# Altium PCB stereoscopicPi.PcbDoc
Units mm, origin at the board's own origin, x right, y up, seen from the top; angles counter-clockwise.
Board outline 100 x 50 mm, 2 copper layers (Top Layer, Bottom Layer); 31 components, 81 nets, 346 pads, 10 vias.
Unrouted connection lines stored in the file: 74.
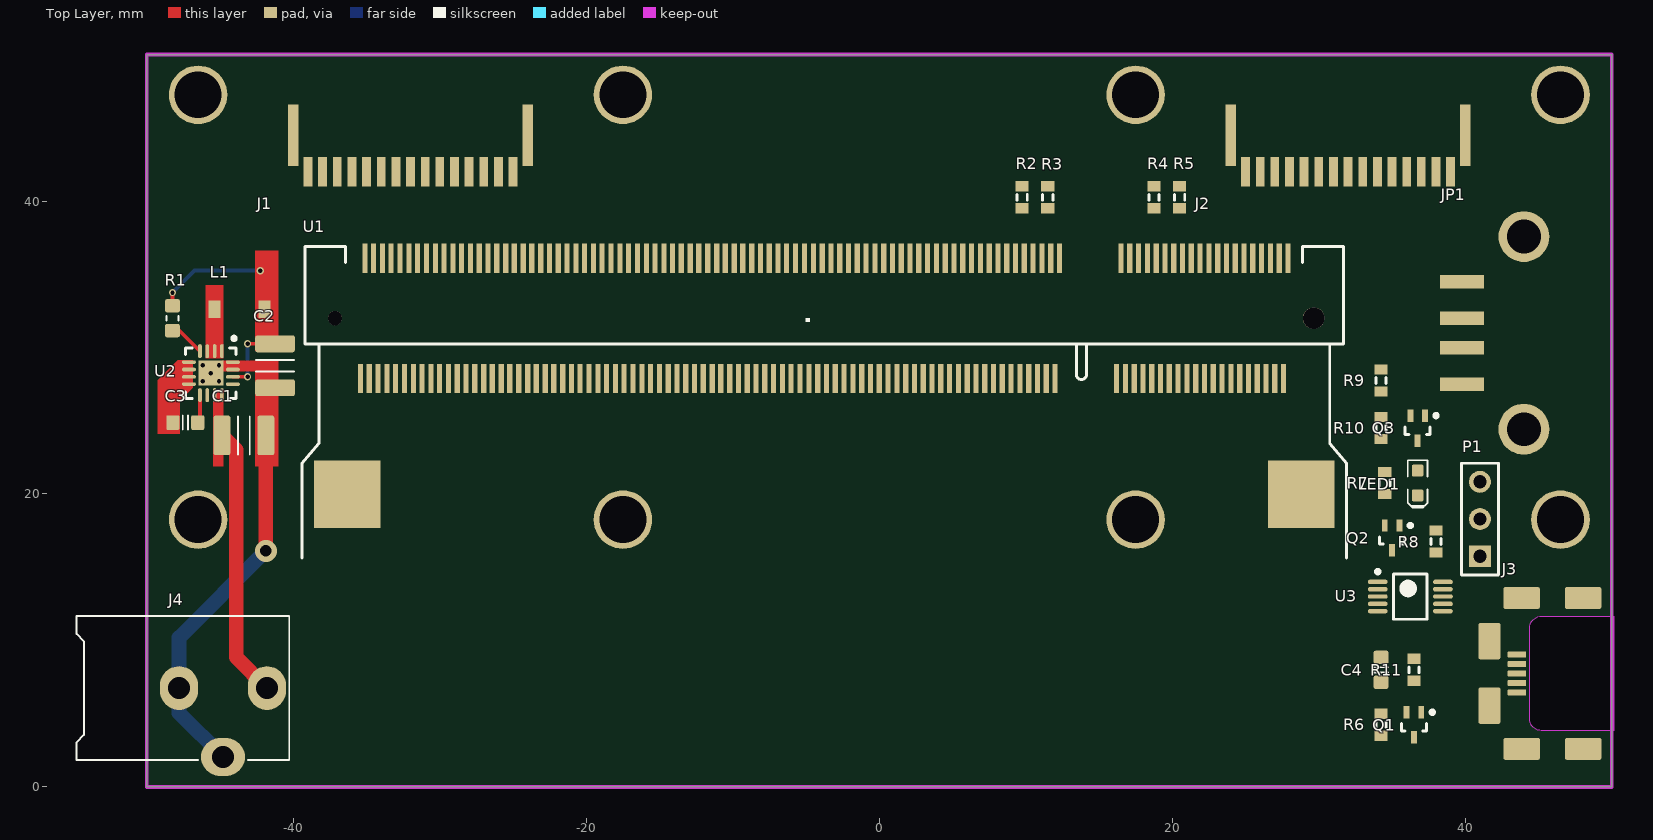
[diagram p0: Top Layer view]
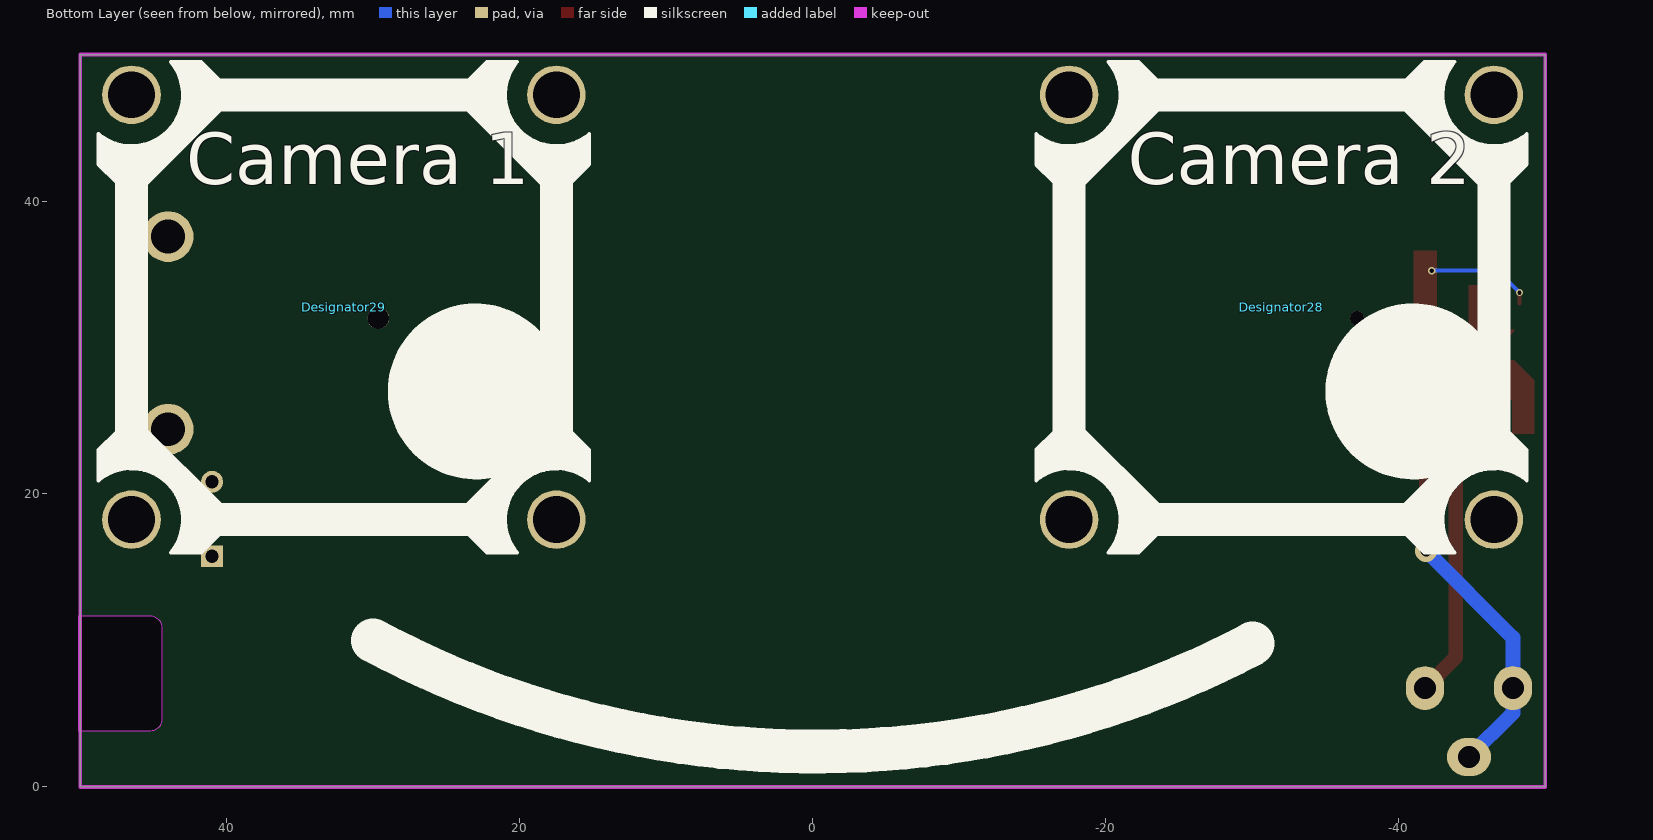
[diagram p1: Bottom Layer view, seen from below]

## Layer stack, top to bottom
Top Solder: solder mask 0.0102, Solder Resist, Dk 3.5
Top Layer: signal copper 0.0356
Dielectric1: dielectric 0.32, FR-4, Dk 4.8
Bottom Layer: signal copper 0.0356
Bottom Solder: solder mask 0.0102, Solder Resist, Dk 3.5

## Board outline
-50,0 -50,50 50,50 50,0

## Design rules (kind name [scope] priority, off if disabled: settings)
Clearance [All] p1: gap=0.1
FabricationTestPointUsage TestPointUsage [All] p1: valid=0 allowmultiple=FALSE
FabricationTestpoint Testpoint [All] p1: side=3 testpointundercomponent=TRUE minsize=1.016 maxsize=2.54 preferedsize=1.524 minholesize=0 maxholesize=1.016 preferedholesize=0.813 testpointgrid=0.025 allowsidetop=TRUE allowsidebottom=TRUE usegrid=TRUE gridtolerance=0
PolygonConnect [All] p1: connectstyle=Relief reliefconductorwidth=0.254 reliefentries=4 polygonreliefangle="90 Angle" airgapwidth=0.254
RoutingVias [All] p1: holewidth=0.711 width=1.27 viastyle="Through Hole" minholewidth=0.711 minwidth=1.27 maxholewidth=0.711 maxwidth=1.27
SilkToSolderMaskClearance SilkscreenOverComponentPads [IsPad] p1: minsilkscreentomaskgap=0.254 clearancetoexposedcopper=TRUE
SolderMaskExpansion [All] p1: expansion=0.102
Width [All] p1: maxlimit=1 minlimit=0.25 preferedwidth=0.25
27 further rules are at their usual default settings.

## Classes and differential pairs
component class StereoscopicPi: C1 C2 C3 C4 J1 J2 J3 J4 JP1 L1 LED1 P1 Q1 Q2 Q3 R1 R2 R3 R4 R5 R6 R7 R8 R9 R10 R11 U1 U2 U3

## Components (designator, comment, footprint, x,y, rotation, side; value= is the part's Value field where it differs from the comment)
C1 "10µ" CAPC3225X220N -43.375,24 r0 top
C2 "approved sub OK" CAPC3225X220N -41.25,28.75 r270 top
C3 "Kemet C0603C332J3RACTU" CAPC1608X90N -47.375,24.875 r180 top
C4 "" CAPC1608X90N 34.25,8 r270 top
Designator28 "Comment" PI-CAM-LENS-MOUNT -32,32.75 r90 bottom
Designator29 "Comment" PI-CAM-LENS-MOUNT 32,32.75 r90 bottom locked
J1 "Camera1" SFW15R-2STE1LF -32,42 r180 top
J2 "Camera2" SFW15R-2STE1LF 32,42 r180 top
J3 "uUSB B (SLAVE, USB BOOT)" USB_Micro-B_Molex_SMD 50,7.75 r180 top
J4 "CONN_PWR_JACK_2.1x5.5mm" CONN_PWR_JACK_2.1x5.5mm -55.5,6.75 r90 top
JP1 "USB A (HOST)" USB-A-S-NOSILK-FEMALE 44,31 r180 top
L1 "Inductor" IHLP-1212BZ-11 -45.375,32.625 r0 top
LED1 "Green" LED-0603-GREEN 36.75,20.75 r270 top
P1 "Header 3" HDR1X3 41,15.75 r90 top
Q1 "DMG1012T-7" DMG1012T-7 36.5,4.25 r270 top
Q2 "DMG1012T-7" DMG1012T-7 35,17 r270 top
Q3 "DMG1012T-7" DMG1012T-7 36.75,24.5 r270 top
R1 "Thick Film" RESC1608X55N -48.25,32 r270 top
R2 "Res3" J1-0603 9.75,40.25 r90 top
R3 "Res3" J1-0603 11.5,40.25 r90 top
R4 "Res3" J1-0603 18.75,40.25 r90 top
R5 "Res3" J1-0603 20.5,40.25 r90 top
R6 "Res3" J1-0603 34.25,4.25 r90 top
R7 "Green" J1-0603 34.5,20.75 r90 top
R8 "Res3" J1-0603 38,16.75 r270 top
R9 "Res3" J1-0603 34.25,27.75 r90 top
R10 "Res3" J1-0603 34.25,24.5 r270 top
R11 "Res3" J1-0603 36.5,8 r90 top
U1 "Raspberry Pi Compute Module As anounced in this blog post  http://www.raspberrypi.org/raspberry-pi-compute-module-new-product/  Based on infomation from this schematic http://www.raspberrypi.org/wp-content/uploads/2014/04/RPI-CM-V1_1-SCHEMATIC.pdf  Footprint is unproven and no matching part confimed as of yet" 1-1376408-4 -4.75,32 r180 top
U2 "TPS62143RGTT" QFN50P300X300X100_HS-17M -45.625,28.25 r270 top
U3 "FSUSB42MUX" FSUSB42MUX 36.25,13 r0 top

## Footprints (in the part's own frame and the unit in brackets; to place one, negate y for a bottom-side part, rotate by r counter-clockwise, add the part's x,y. Pads: shape width x height; smd on the part's side, far side on the other; paste and mask are expansions set on the pad)
1-1376408-4 [mil]
  round 58 hole 58: 1(-1354.33,0)
  rect 14x79 smd: 1(-1285.43,-161.42) 2(-1273.62,162) 3(-1261.81,-161.42) 4(-1250,162) 5(-1238.19,-161.42) 6(-1226.38,162) 7(-1214.57,-161.42) 8(-1202.76,162) 9(-1190.94,-161.42) 10(-1179.13,162) 11(-1167.32,-161.42) 12(-1155.51,162) 13(-1143.7,-161.42) 14(-1131.89,162) 15(-1120.08,-161.42) 16(-1108.27,162) 17(-1096.46,-161.42) 18(-1084.65,162) 19(-1072.83,-161.42) 20(-1061.02,162) 21(-1049.21,-161.42) 22(-1037.4,162) 23(-1025.59,-161.42) 24(-1013.78,162) 25(-1001.97,-161.42) 26(-990.16,162) 27(-978.35,-161.42) 28(-966.54,162) 29(-954.72,-161.42) 30(-942.91,162) 31(-931.1,-161.42) 32(-919.29,162) 33(-907.48,-161.42) 34(-895.67,162) 35(-883.86,-161.42) 36(-872.05,162) 37(-860.24,-161.42) 38(-848.43,162) 39(-836.61,-161.42) 40(-824.8,162) 41(-671.26,-161.42) 42(-659.45,162) 43(-647.64,-161.42) 44(-635.83,162) 45(-624.02,-161.42) 46(-612.2,162) 47(-600.39,-161.42) 48(-588.58,162) 49(-576.77,-161.42) 50(-564.96,162) 51(-553.15,-161.42) 52(-541.34,162) 53(-529.53,-161.42) 54(-517.72,162) 55(-505.91,-161.42) 56(-494.09,162) 57(-482.28,-161.42) 58(-470.47,162) 59(-458.66,-161.42) 60(-446.85,162) 61(-435.04,-161.42) 62(-423.23,162) 63(-411.42,-161.42) 64(-399.61,162) 65(-387.8,-161.42) 66(-375.98,162) 67(-364.17,-161.42) 68(-352.36,162) 69(-340.55,-161.42) 70(-328.74,162) 71(-316.93,-161.42) 72(-305.12,162) 73(-293.31,-161.42) 74(-281.5,162) 75(-269.68,-161.42) 76(-257.87,162) 77(-246.06,-161.42) 78(-234.25,162) 79(-222.44,-161.42) 80(-210.63,162) 81(-198.82,-161.42) 82(-187.01,162) 83(-175.2,-161.42) 84(-163.39,162) 85(-151.57,-161.42) 86(-139.76,162) 87(-127.95,-161.42) 88(-116.14,162) 89(-104.33,-161.42) 90(-92.52,162) 91(-80.71,-161.42) 92(-68.9,162) 93(-57.09,-161.42) 94(-45.28,162) 95(-33.46,-161.42) 96(-21.65,162) 97(-9.84,-161.42) 98(2,162) 99(14,-161.42) 100(26,162) 101(38,-161.42) 102(50,162) 103(62,-161.42) 104(73,162) 105(85,-161.42) 106(97,162) 107(109,-161.42) 108(121,162) 109(132,-161.42) 110(144,162) 111(156,-161.42) 112(168,162) 113(180,-161.42) 114(191,162) 115(203,-161.42) 116(215,162) 117(227,-161.42) 118(239,162) 119(250,-161.42) 120(262,162) 121(274,-161.42) 122(286,162) 123(298,-161.42) 124(310,162) 125(321,-161.42) 126(333,162) 127(345,-161.42) 128(357,162) 129(369,-161.42) 130(380,162) 131(392,-161.42) 132(404,162) 133(416,-161.42) 134(428,162) 135(439,-161.42) 136(451,162) 137(463,-161.42) 138(475,162) 139(487,-161.42) 140(499,162) 141(510,-161.42) 142(522,162) 143(534,-161.42) 144(546,162) 145(558,-161.42) 146(569,162) 147(581,-161.42) 148(593,162) 149(605,-161.42) 150(617,162) 151(628,-161.42) 152(640,162) 153(652,-161.42) 154(664,162) 155(676,-161.42) 156(688,162) 157(699,-161.42) 158(711,162) 159(723,-161.42) 160(735,162) 161(747,-161.42) 162(758,162) 163(770,-161.42) 164(782,162) 165(794,-161.42) 166(806,162) 167(817,-161.42) 168(829,162) 169(841,-161.42) 170(853,162) 171(865,-161.42) 172(876,162) 173(888,-161.42) 174(900,162) 175(912,-161.42) 176(924,162) 177(936,-161.42) 178(947,162) 179(959,-161.42) 180(971,162) 181(983,-161.42) 182(995,162) 183(1006,-161.42) 184(1018,162) 185(1030,-161.42) 186(1042,162) 187(1054,-161.42) 188(1065,162) 189(1077,-161.42) 190(1089,162) 191(1101,-161.42) 192(1113,162) 193(1125,-161.42) 194(1136,162) 195(1148,-161.42) 196(1160,162) 197(1172,-161.42) 198(1184,162) 199(1195,-161.42) 200(1207,162)
  round 38 hole 38: 1(1276,0)
  rect 178x182 smd: M1(-1320.87,473) M2(1243,473)
  silkscreen extent -1443,-193 1365,644
CAPC1608X90N [mm] "Chip Capacitor, Body 1.6x0.8mm, EIA 0603, IPC Medium Density"
  round 0.254 on Mech15: 0(0,0)
  rrect25% 0.9x1 smd: 1(-0.85,0) 2(0.85,0)
  Top Layer pour cut-out: -0.6,0.5 -0.4,0.7 0.4,0.7 0.6,0.5 0.6,-0.5 0.4,-0.7 -0.4,-0.7 -0.6,-0.5
  silkscreen extent -0.18,-0.48 0.18,0.48, body extent -0.85,-0.45 0.85,0.45, height 0.89
CAPC3225X220N [mm] "Chip Capacitor, Body 3.2x2.5mm, EIA 1210, IPC Medium Density"
  round 0.508 on Mech15: 0(0,0)
  rrect25% 1.15x2.7 smd: 1(-1.5,0) 2(1.5,0)
  silkscreen extent -0.4,-1.3 0.4,1.3, body extent -1.8,-1.4 1.8,1.4, height 2.19
CONN_PWR_JACK_2.1x5.5mm [mm] "Power Connector, 2.1mm ID, 5.5mm OD"
  oval 3x2.6 hole 1.511: 1(0,-13.7) 2(0,-7.7)
  oval 2.6x3 hole 1.511: 3(-4.7,-10.7)
  silkscreen extent -4.9,-15.22 4.92,-0.7, body extent -4.9,-14.1 4.5,0, height 11
DMG1012T-7 [mm] "SOT23, 3-Leads, Body 1.60x1.60mm, Pitch 0.50mm, IPC Medium Density"
  rect 0.85x0.4 smd: D(0.85,0) G(-0.85,0.5) S(-0.85,-0.5)
  silkscreen extent -0.97,-0.85 0.43,1.38, body extent -0.43,-0.85 0.43,0.85, height 0.9
FSUSB42MUX [mm] "TSSOP, 10-Leads, Body 3.00x3.00mm, Pitch 0.50mm, IPC Medium Density"
  oval 1.35x0.3 smd: 1(-2.225,1) 2(-2.225,0.5) 3(-2.225,0) 4(-2.225,-0.5) 5(-2.225,-1) 6(2.225,-1) 7(2.225,-0.5) 8(2.225,0) 9(2.225,0.5) 10(2.225,1)
  silkscreen extent -2.35,-1.55 1.15,1.82, body extent -1.55,-1.55 1.55,1.55, height 1.1
HDR1X3 [mm] "Connector; Header; 3 Position"
  rect 1.5x1.5 hole 0.9: 1(0,0)
  round 1.5 hole 0.9: 2(2.54,0) 3(5.08,0)
  silkscreen extent -1.27,-1.27 6.35,1.27
IHLP-1212BZ-11 [mm]
  rect 0.8x1.2 smd: 0(0,0) 1(3.4,0)
  body extent -0.1,-1.5 3.55,1.5, height 2
J1-0603 [mm] "Chip Resistor, Body 1.6x0.8mm, IPC High Density"
  rect 0.7x0.9 smd: 1(-0.75,0) 2(0.75,0)
  silkscreen extent -0.2,-0.35 0.2,0.35, body extent -0.85,-0.48 0.85,0.48, height 0.9
LED-0603-GREEN [mm]
  round 0.254 on Mech15: 0(0,0)
  rrect25% 0.8x0.8 smd: A(-0.85,0) K(0.85,0)
  Top Layer pour cut-out: -0.5,0.5 0.5,0.5 0.5,-0.5 -0.5,-0.5
  silkscreen extent -1.55,-0.67 1.68,0.67, body extent -0.8,-0.4 0.8,0.4, height 0.75
PI-CAM-LENS-MOUNT [mm]
  round 4 hole 3.2: M3(-14.5,-14.5) M3(-14.5,14.5) M3(14.5,-14.5) M3(14.5,14.5)
  silkscreen extent -16.75,-16.75 16.75,16.75
QFN50P300X300X100_HS-17M [mm] "QFN, 16-Leads, Body 3.00x3.00mm, Pitch 0.50mm, Thermal Pad 1.70x1.70mm, IPC Low Density"
  oval 0.95x0.25 smd: 1(-1.5,0.75) 1(-1.5,-0.25) 1(-1.5,0.25) 4(-1.5,-0.75) 9(1.5,-0.75) 10(1.5,-0.25) 11(1.5,0.75) 11(1.5,0.25)
  oval 0.25x0.95 smd: 5(-0.75,-1.5) 6(-0.25,-1.5) 7(0.25,-1.5) 8(0.75,-1.5) 13(0.75,1.5) 14(0.25,1.5) 15(-0.75,1.5) 15(-0.25,1.5)
  rect 1.7x1.7 smd: 15(0,0)
  silkscreen extent -2.5,-1.73 1.73,1.73, body extent -1.58,-1.58 1.58,1.58, height 1
RESC1608X55N [mm] "Chip Resistor, Body 1.6x0.8mm, EIA 0603, IPC Medium Density"
  round 0.254 on Mech15: 0(0,0)
  rrect25% 0.9x1 smd: 1(-0.85,0) 2(0.85,0)
  Top Layer pour cut-out: -0.6,0.5 -0.4,0.7 0.4,0.7 0.6,0.5 0.6,-0.5 0.4,-0.7 -0.4,-0.7 -0.6,-0.5
  silkscreen extent -0.15,-0.41 0.15,0.41, body extent -0.87,-0.47 0.88,0.48, height 0.54
SFW15R-2STE1LF [mm]
  rect 0.6x2 smd: 1(-7,0) 2(-6,0) 3(-5,0) 4(-4,0) 5(-3,0) 6(-2,0) 7(-1,0) 8(0,0) 9(1,0) 10(2,0) 11(3,0) 12(4,0) 13(5,0) 14(6,0) 15(7,0)
  rect 0.7x4.2 smd: ""(-8,-2.5) ""(8,-2.5)
  body extent -10.5,-6.5 10.5,0, height 2.7
USB-A-S-NOSILK-FEMALE [mil]
  rect 119x36 smd: D+(166,-39.37) D-(166,40) GND(166,-137.8) VBUS(166,138)
  round 136.5 hole 91: S1(0,-258.5) S2(0,259)
USB_Micro-B_Molex_SMD [mm]
  round 0.508 on Mech15: 0(0,0)
  rrect20% 1.25x0.4 smd: 1(6.475,1.3) 2(6.475,0.65) 3(6.475,0) 4(6.475,-0.65) 5(6.475,-1.3)
  rrect20% 2.5x1.5 smd: SH(1.95,5.15) SH(1.95,-5.15) SH(6.15,5.15) SH(6.15,-5.15)
  rrect20% 1.5x2.5 smd: SH(8.35,-2.2) SH(8.35,2.2)
  Keep-Out Layer board cut-out: -0.127,3.9 4.8,3.9 5.106,3.839 5.366,3.666 5.539,3.406 5.6,3.1 5.6,3.1 5.6,-3.1 5.539,-3.406 5.366,-3.666 5.106,-3.839 4.8,-3.9 4.8,-3.9 -0.127,-3.9
  body extent -21.01,-5.5 8.7,5.5, height 4.1

## Part data
C1: library part CAPC_10u_1210_50V, "Capacitor SMD Cer 10uF 20% 16V X5R 1210"
C2: library part CAPC_22u_1210_6V3_X5R, "Capacitor SMD Cer 22uF 20% 6.3V X5R 1210"
C3 C4: library part CAPC_10n_0603_X7R_50V_10%, "Capacitor SMD Cer 10nF 10% 50V X7R 0603"
J1 J2: library part SFW15R-2STE1LF
J3: library part USB_Micro_TypeB, "Connector SMD USB Micro Type B middle mount"
J4: "Power Connector, THT, 2.1mm ID, 5.5mm OD"
JP1: library part USB-A-SMD
LED1: library part LED_SMD_Green_0603_570nm, "LED 0603 SMD Green 570nm 50mcd 20mA"
P1: "Header, 3-Pin"
R1: library part RES_100K_0603_1%, "Resistor SMD chip 100k Ohm 0.1W 1% 0603"
R2 R3 R4 R5 R6 R8 R9 R10 R11: "Resistor"
R7: library part Res3, "Resistor"
U1: library part RASPBERRY_PI_CM-1-1376408-4
U2: library part "TPS62143 5V 2A LDO SMPS Buck"

## Via types
v1: diameter 0.5, hole 0.3, Top Layer to Bottom Layer, 9 vias
v2: diameter 1.5, hole 0.8, Top Layer to Bottom Layer, 1 vias

## Nets (pads, with @x,y where several pads share a name; then routed paths per layer and width w, separated by ;. In a path a pad name is that pad's centre, name@x,y a point inside that pad or via, vN(x,y) a via of type N, cw(c..) or ccw(c..) an arc to the next point about the centre after c; other vN are vias at no path point)
1V8: R9.2
3V3: C4.2 J1.15 J2.15 R2.2 R3.2 R4.2 R5.2 R6.2 R7.1 U3.1
5V: C2.1 L1.1 R1.1 U2.14 | length 12.2
  Top Layer w0.254: R1.1@-48.25,33 v1(-48.25,33.75) ; U2.14 v1(-43.125,28) ; v1(-43.125,30.25) C2.1@-41.5,30.25
  Bottom Layer w0.254: v1(-48.25,33.75) -46.75,35.25 v1(-42.25,35.25) ; v1(-43.125,28) v1(-43.125,30.25)
CAM0_CN: J1.8 U1.144
CAM0_CP: J1.9 U1.142
CAM0_DN0: J1.2 U1.138
CAM0_DN1: J1.5 U1.150
CAM0_DP0: J1.3 U1.136
CAM0_DP1: J1.6 U1.148
CAM0_IO0: J1.11 U1.36
CAM0_IO1: J1.12 U1.34
CAM1_CN: J2.8 U1.149
CAM1_CP: J2.9 U1.147
CAM1_DN0: J2.2 U1.161
CAM1_DN1: J2.5 U1.155
CAM1_DP0: J2.3 U1.159
CAM1_DP1: J2.6 U1.153
CAM1_IO0: J2.11 U1.17
CAM1_IO1: J2.12 U1.15
CD0_SCL: J1.13 R2.1 U1.30
CD0_SDA: J1.14 R3.1 U1.28
CD1_SCL: J2.13 R5.1 U1.5
CD1_SDA: J2.14 R4.1 U1.3
EMMC_DISABLE_N: Q2.D U1.2
GND: C1.2 C2.2 C3.2 C4.1 J1.1 J1.4 J1.7 J1.10 J2.1 J2.4 J2.7 J2.10 J3.5 J3.SH J4.2 J4.3 JP1.GND P1.3 Q1.S Q3.S R8.2 R11.2 U2.5 U2.6 U2.7 U2.8 U2.15 U3.5 U3.10 | length 25.6
  Top Layer w1: v2(-41.875,16.125) C1.2
  Bottom Layer w1: J4.3 -47.8,5.05 J4.2 -47.8,10.2 v2(-41.875,16.125)
  other v1: -46.175,27.7 -45.075,27.7 -45.625,28.25 -46.175,28.8 -45.075,28.8
GPIO47_1V8: Q3.G R10.2 U1.90
GPIO47_CTL_1V8: R9.1 R10.1
GPIO_2: U1.9
GPIO_3: U1.11
GPIO_6: U1.21
GPIO_7: U1.23
GPIO_8: U1.27
GPIO_9: U1.29
GPIO_10: U1.33
GPIO_11: U1.35
GPIO_12: U1.45
GPIO_13: U1.47
GPIO_14: U1.51
GPIO_15: U1.53
GPIO_16: U1.57
GPIO_17: U1.59
GPIO_18: U1.63
GPIO_19: U1.65
GPIO_20: U1.69
GPIO_21: U1.71
GPIO_22: U1.75
GPIO_23: U1.77
GPIO_24: U1.81
GPIO_25: U1.83
GPIO_26: U1.87
GPIO_27: U1.89
GPIO_32: U1.46
GPIO_33: U1.48
GPIO_34: U1.52
GPIO_35: U1.54
GPIO_36: U1.58
GPIO_37: U1.60
GPIO_38: U1.64
GPIO_39: U1.66
GPIO_40: U1.70
GPIO_41: U1.72
GPIO_42: U1.76
GPIO_43: U1.78
GPIO_44: U1.82
GPIO_45: U1.84
NetC3_1: C3.1 U2.9 | length 1.9
  Top Layer w0.254: C3.1 -46.375,25.025 U2.9
NetJ3_2: J3.2 U3.6
NetJ3_3: J3.3 U3.7
NetJP1_D+: JP1.D+ U3.9
NetJP1_D-: JP1.D- U3.8
NetL1_0: L1.0 U2.1
NetLED1_A: LED1.A R7.2
NetLED1_K: LED1.K Q2.S Q3.D
NetP1_2: P1.2 Q2.G R8.1
NetQ1_D: Q1.D R6.1 U3.2
NetR1_2: R1.2 U2.4 | length 2
  Top Layer w0.254: R1.2@-47.775,31.15 U2.4
USB_DM: U1.167 U3.4
USB_DP: U1.165 U3.3
VBUSA: JP1.VBUS
VBUSB: J3.1 P1.1 Q1.G R11.1
VIN: C1.1 J4.1 U2.10 U2.11 U2.13 | length 18.5
  Top Layer w1: C1.1 -43.9,23.025 -43.9,8.85 J4.1
pads on no net: C1.0 C2.0 C3.0 C4.0 Designator28.M3 Designator29.M3 J1. J2. J3.0 J3.4 JP1.S1 JP1.S2 LED1.0 R1.0 U1.1 U1.4 U1.6 U1.7 U1.8 U1.10 U1.12 U1.13 U1.14 U1.16 U1.18 U1.19 U1.20 U1.22 U1.24 U1.25 U1.26 U1.31 U1.32 U1.37 U1.38 U1.39 U1.40 U1.41 U1.42 U1.43 U1.44 U1.49 U1.50 U1.55 U1.56 U1.61 U1.62 U1.67 U1.68 U1.73 U1.74 U1.79 U1.80 U1.85 U1.86 U1.88 U1.91 U1.92 U1.93 U1.94 U1.95 U1.96 U1.97 U1.98 U1.99 U1.100 U1.101 U1.102 U1.103 U1.104 U1.105 U1.106 U1.107 U1.108 U1.109 U1.110 U1.111 U1.112 U1.113 U1.114 U1.115 U1.116 U1.117 U1.118 U1.119 U1.120 U1.121 U1.122 U1.123 U1.124 U1.125 U1.126 U1.127 U1.128 U1.129 U1.130 U1.131 U1.132 U1.133 U1.134 U1.135 U1.137 U1.139 U1.140 U1.141 U1.143 U1.145 U1.146 U1.151 U1.152 U1.154 U1.156 U1.157 U1.158 U1.160 U1.162 U1.163 U1.164 U1.166 U1.168 U1.169 U1.170 U1.171 U1.172 U1.173 U1.174 U1.175 U1.176 U1.177 U1.178 U1.179 U1.180 U1.181 U1.182 U1.183 U1.184 U1.185 U1.186 U1.187 U1.188 U1.189 U1.190 U1.191 U1.192 U1.193 U1.194 U1.195 U1.196 U1.197 U1.198 U1.199 U1.200 U1.M1 U1.M2

## Polygon pours and split planes (outlines as drawn)
GND on Bottom Layer "GND" (solid, remove dead copper, shelved, pour order 0): -50,50 -50,0 50,0 50,50

## Keep-outs
Keep-Out Layer:
  the board outline again, w0.25

## Other copper
Top Layer:
  region net 5V: -41,29.75 -41,36.625 -42.6,36.625 -42.6,29.75
  region net NetL1_0: -44.75,29.25 -44.75,34.25 -46,34.25 -46,29.25
  region net GND: -42.375,28.375 -42.375,29.125 -44.875,29.125 -44.875,28.375
  region net GND: -41,21.875 -41,29.125 -42.625,29.125 -42.625,21.875
  region net VIN: -44.75,21.875 -44.75,27.125 -45.5,27.125 -45.5,21.875
  region net GND: -46.875,27.25 -46.875,29.125 -47.875,29.125 -49.25,27.75 -49.25,24.125 -47.75,24.125 -47.75,26.375

## Silkscreen, mask and mechanical layers (free items; w line width, h text height)
Bottom Overlay:
  circle w6: c-41,27 r3
  circle w6: c23,27 r3
  lines w3: -30.03,9.78 ccw(c-0.222,66.415) 30,10
  text "Camera 2" at -21.5,40 h6
  text "Camera 1" at 42.75,40 h6
Mechanical 16:
  drawing of 1874 lines, arcs and shapes, not listed
  text "1" at -98.754,120.611 h1.78
  text "2" at -26.11,120.611 h1.78
  text "3" at 47.042,120.611 h1.78
  text "4" at 119.94,120.611 h1.78
  text "A" at -133.095,97.599 h1.78
  text "A" at 153.925,97.599 h1.78
  text "B" at -133.095,49.542 h1.78
  text "B" at 153.925,49.542 h1.78
  text "C" at -133.095,1.028 h1.78
  text "C" at 153.925,1.028 h1.78
  text "ENGINEER:" at 38.99,-35.98 h1.14
  text "TITLE:" at 77.09,-35.98 h1.14
  text "PCB DESIGNER:" at 38.99,-43.473 h1.14
  text "D" at -133.095,-46.978 h1.78
  text "D" at 153.925,-46.978 h1.78
  text "DATE:" at 38.99,-51.22 h1.14
  text "PART NO.:" at 77.09,-51.22 h1.14
  text "REV:" at 130.43,-51.22 h1.14
  text "Altium Limited" at 5.97,-53.76 h1.78
  text ".PRINT_DATE" at 40.26,-54.268 h1.78
  text "12a Rodborough Rd" at 5.97,-56.3 h1.78
  text "Frenchs Forest" at 5.97,-58.84 h1.78
  text "FILE NAME:" at 38.99,-58.84 h1.14
  text "DWG NO:" at 77.09,-58.84 h1.14
  text "SCALE:" at 130.43,-58.84 h1.14
  text "NSW 2086" at 5.97,-61.38 h1.78
  text ".PCB_FILE_NAME_NO_PATH" at 40.26,-61.888 h1.78
  text "1" at -98.754,-67.349 h1.78
  text "2" at -26.11,-67.349 h1.78
  text "3" at 47.042,-67.349 h1.78
  text "4" at 119.94,-67.349 h1.78

## Dimensions
-50,50 to 50,50 on Mechanical 1
-50,50 to -50,0 on Mechanical 1